# EAGLE board coin_acceptor____ (EAGLE 8.3.1)
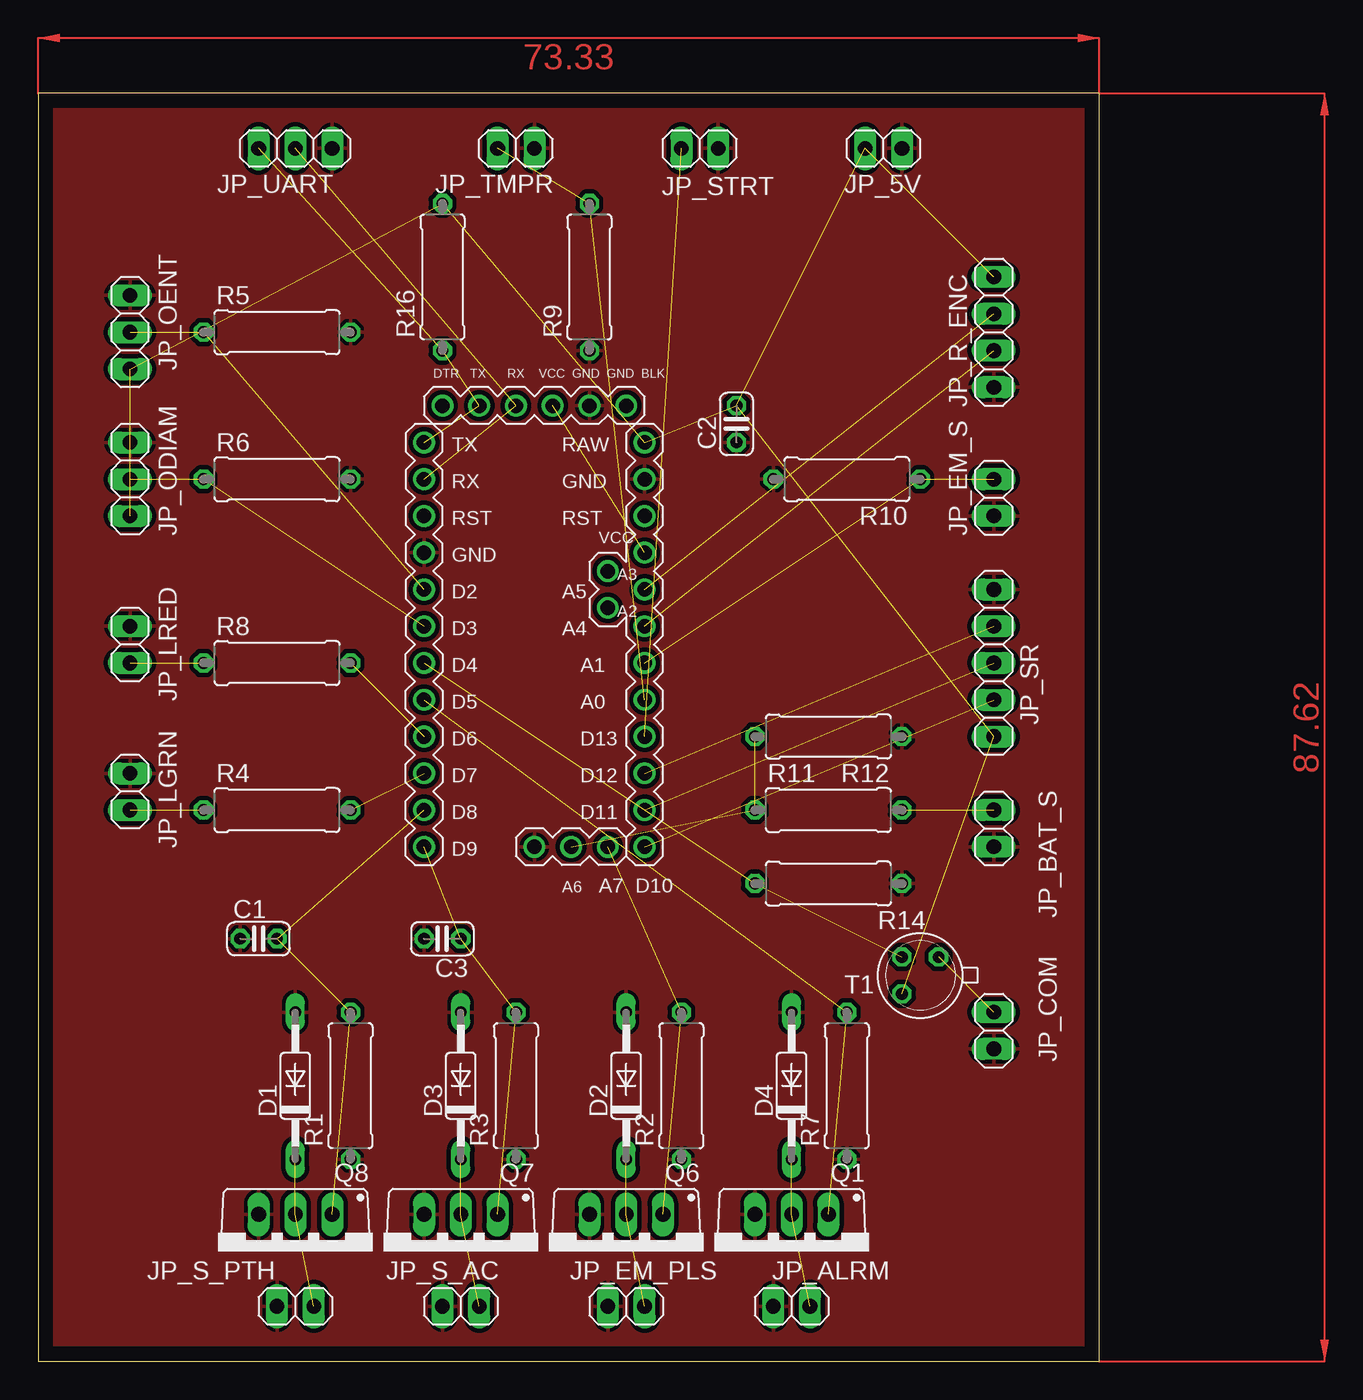
[diagram p0: board, top side]
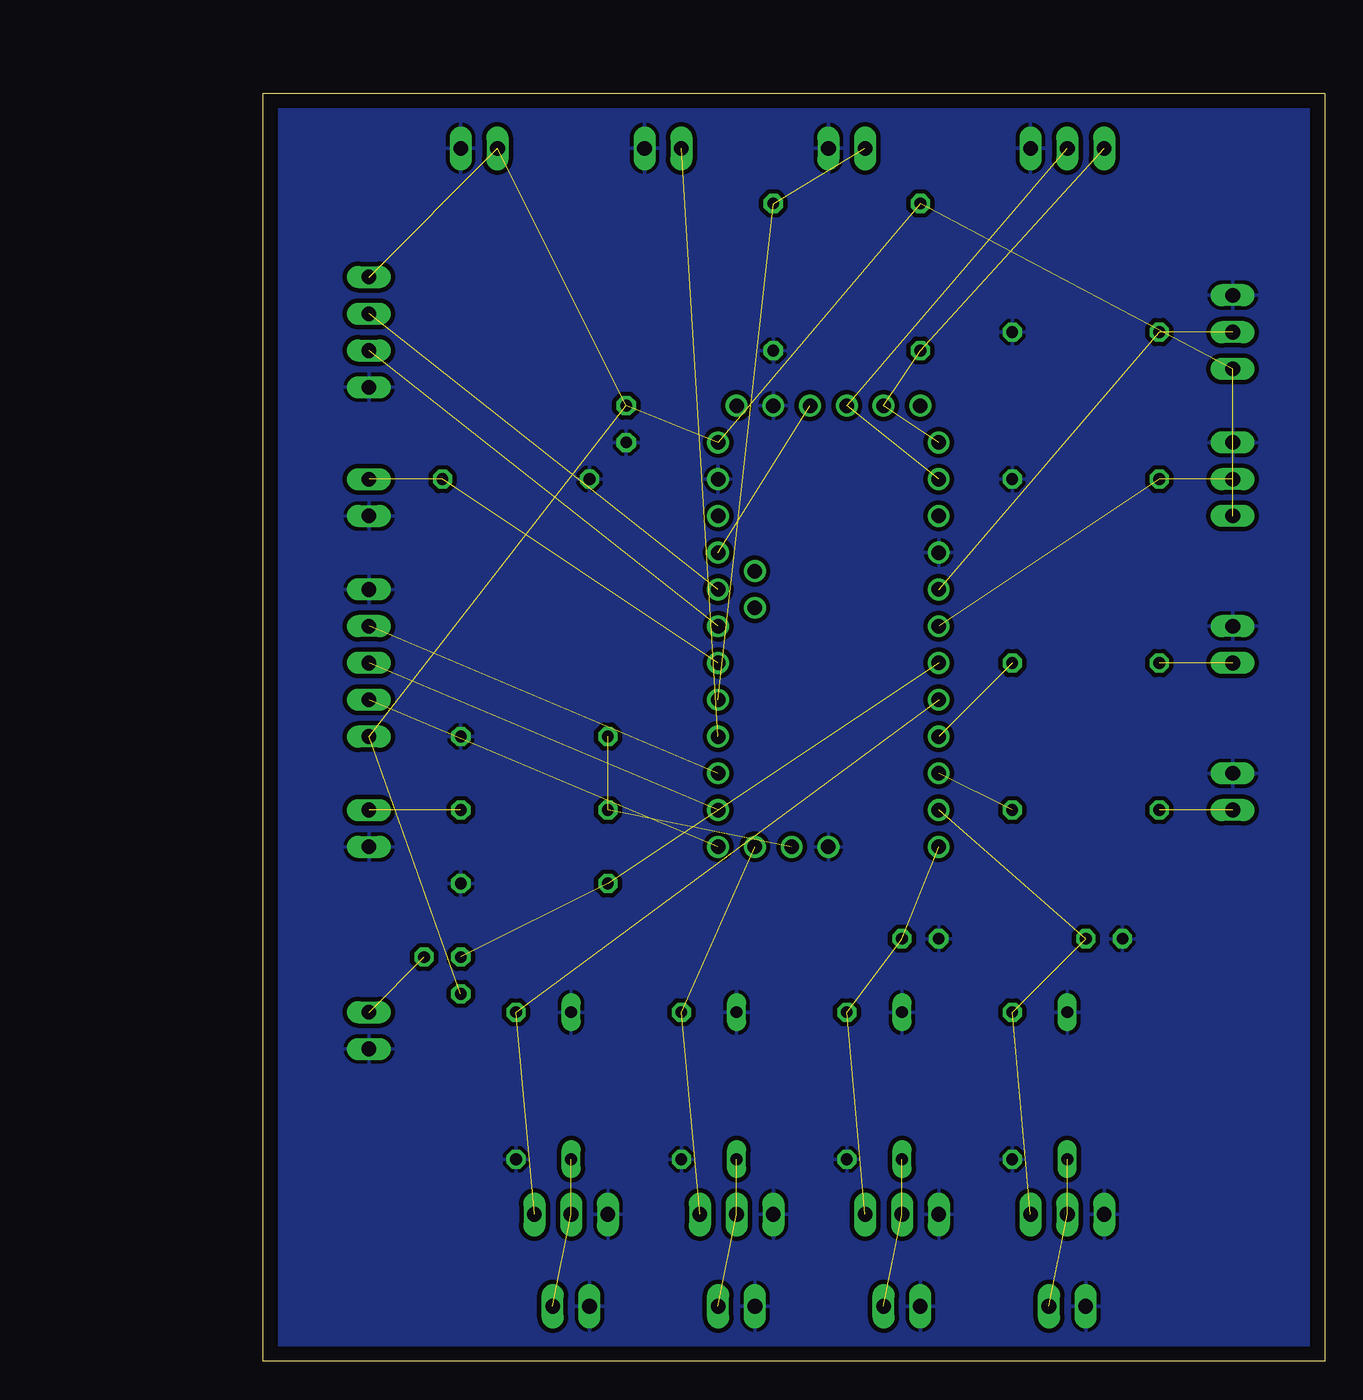
[diagram p1: board, bottom side, seen from below]

Size 73.33 x 87.62 mm. Coordinates in mm from the lower left corner, seen from the top.
Outline: 0,0 73.33,0 73.33,87.62 0,87.62 0,0
Copper layers (1*16): Top 0.035mm / dielectric 1.5mm / Bottom 0.035mm
Design rules "default *": minimum track width 20mil, minimum drill 0.35mm, track to track 6mil, track to pad 6mil, pad to pad 6mil, via to via 6mil, smd to smd 6mil, copper to edge 40mil, drill to drill 6mil, minimum pad ring 10mil, minimum via ring 8mil, stop-mask expansion 4mil, vias tented up to drill 0mil, thermal gap 10mil
Net classes: 0 default: width 0.508 mm, drill 0.254 mm, clearance 0.305 mm; 1 Supply: width 1.016 mm, drill 0.254 mm, clearance 0.305 mm; 2 Analog: width 0.762 mm, drill 0.254 mm, clearance 0.61 mm

## Footprints (pad centres in the part's own frame; a part is rotated, then mirrored left to right if it is on the bottom)
ARDUINO_PRO_MINI = drill 1: A0 11.43,-8.89; A1 11.43,-6.35; A2 11.43,-3.81; A3 11.43,-1.27; A4 8.89,-2.54; A5 8.89,0; A6 6.35,-19.05; A7 8.89,-19.05; BLK 10.16,11.43; D2 -3.81,-1.27; D3 -3.81,-3.81; D4 -3.81,-6.35; D5 -3.81,-8.89; D6 -3.81,-11.43; D7 -3.81,-13.97; D8 -3.81,-16.51; D9 -3.81,-19.05; D10 11.43,-19.05; D11 11.43,-16.51; D12 11.43,-13.97; D13 11.43,-11.43; DTR -2.54,11.43; GND -3.81,1.27; GND@1 11.43,6.35; GND@2 7.62,11.43; GND@3 3.81,-19.05; RAW 11.43,8.89; RST 11.43,3.81; RST@1 -3.81,3.81; RX -3.81,6.35; RX@1 2.54,11.43; TX -3.81,8.89; TX@1 0,11.43; VCC 11.43,1.27; VCC@1 5.08,11.43
C025-024X044 = drill 0.813 octagon: 1 -1.27,0; 2 1.27,0
DO35-10 = drill 0.813 long: A 5.08,0; C -5.08,0
1X02 = drill 1.016 long: 1 -1.27,0; 2 1.27,0
1X03 = drill 1.016 long: 1 -2.54,0; 2 0,0; 3 2.54,0
1X04 = drill 1.016 long: 1 -3.81,0; 2 -1.27,0; 3 1.27,0; 4 3.81,0
1X05 = drill 1.016 long: 1 -5.08,0; 2 -2.54,0; 3 0,0; 4 2.54,0; 5 5.08,0
TO220BV = drill 1.016 long: D 0,-2.54; G -2.54,-2.54; S 2.54,-2.54
0309/10 = drill 0.813 octagon: 1 -5.08,0; 2 5.08,0
TO18 = drill 0.813 octagon: 1 -1.27,-1.27; 2 1.27,-1.27; 3 1.27,1.27

## Placement (x,y rotation side)
ARDUINO1  [ARDUINO_PRO_MINI]  30.48,54.61 0 top
C1  10uF  [C025-024X044]  15.24,29.21 0 top
C2  10uF  [C025-024X044]  48.26,64.77 90 top
C3  10uF  [C025-024X044]  27.94,29.21 180 top
D1  [DO35-10]  17.78,19.05 90 top
D2  [DO35-10]  40.64,19.05 90 top
D3  [DO35-10]  29.21,19.05 90 top
D4  [DO35-10]  52.07,19.05 90 top
JP_5V  [1X02]  58.42,83.82 180 top
JP_ALRM  [1X02]  52.07,3.81 0 top
JP_BAT_S  [1X02]  66.04,36.83 90 top
JP_COM  [1X02]  66.04,22.86 90 top
JP_EM_PLS  [1X02]  40.64,3.81 0 top
JP_EM_S  [1X02]  66.04,59.69 90 top
JP_LGRN  [1X02]  6.35,39.37 270 top
JP_LRED  [1X02]  6.35,49.53 270 top
JP_ODIAM  [1X03]  6.35,60.96 270 top
JP_OENT  [1X03]  6.35,71.12 270 top
JP_R_ENC  [1X04]  66.04,71.12 90 top
JP_S_AC  [1X02]  29.21,3.81 0 top
JP_S_PTH  [1X02]  17.78,3.81 0 top
JP_SR  [1X05]  66.04,48.26 270 top
JP_STRT  [1X02]  45.72,83.82 180 top
JP_TMPR  [1X02]  33.02,83.82 180 top
JP_UART  [1X03]  17.78,83.82 180 top
Q1  IRF512  [TO220BV]  52.07,7.62 180 top
Q6  IRF512  [TO220BV]  40.64,7.62 180 top
Q7  IRF512  [TO220BV]  29.21,7.62 180 top
Q8  IRF512  [TO220BV]  17.78,7.62 180 top
R1  1k  [0309/10]  21.59,19.05 90 top
R2  1k  [0309/10]  44.45,19.05 90 top
R3  1k  [0309/10]  33.02,19.05 90 top
R4  0.3k  [0309/10]  16.51,38.1 0 top
R5  1k  [0309/10]  16.51,71.12 0 top
R6  1k  [0309/10]  16.51,60.96 0 top
R7  1k  [0309/10]  55.88,19.05 90 top
R8  0.3k  [0309/10]  16.51,48.26 0 top
R9  5k  [0309/10]  38.1,74.93 90 top
R10  100k  [0309/10]  55.88,60.96 180 top
R11  7k  [0309/10]  54.61,38.1 0 top
R12  2k  [0309/10]  54.61,43.18 180 top
R14  5k  [0309/10]  54.61,33.02 180 top
R16  1k  [0309/10]  27.94,74.93 90 top
T1  2N706  [TO18]  60.96,26.67 180 top

## Library data of the parts
ARDUINO1 = arduinopromini
C1-C3 = rcl
D1-D4 = diode
JP_5V JP_ALRM JP_BAT_S JP_COM JP_EM_PLS JP_EM_S JP_LGRN JP_LRED JP_ODIAM JP_OENT JP_R_ENC JP_S_AC JP_S_PTH JP_SR JP_STRT JP_TMPR JP_UART = pinhead
Q1 Q6-Q8 = transistor-power
R1-R12 R14 R16 = resistor
T1 = transistor

## Nets
+5V [Supply]: ARDUINO1.RAW C2.2 JP_5V.2 JP_ODIAM.3 JP_OENT.3 JP_R_ENC.4 JP_SR.5 R16.2 T1.3
ALARM_0: ARDUINO1.D5 Q1.G R7.2
ALARM_Q: D4.C JP_ALRM.2 Q1.D
BATT_SENS: ARDUINO1.A6 R11.1 R12.2
BTN_STRT: ARDUINO1.D13 JP_STRT.2
GND [Supply]: ARDUINO1.GND ARDUINO1.GND@1 ARDUINO1.GND@2 ARDUINO1.GND@3 C1.1 C2.1 C3.2 D1.A D2.A D3.A D4.A JP_5V.1 JP_ALRM.1 JP_BAT_S.1 JP_COM.1 JP_EM_PLS.1 JP_EM_S.1 JP_LGRN.1 JP_LRED.1 JP_ODIAM.1 JP_OENT.1 JP_R_ENC.1 JP_S_AC.1 JP_S_PTH.1 JP_SR.1 JP_STRT.1 JP_TMPR.1 JP_UART.1 Q1.S Q6.S Q7.S Q8.S R1.1 R2.1 R3.1 R5.2 R6.2 R7.1 R9.1 R10.2 R12.1 R14.1
GPRS_GPS: ARDUINO1.D4 R14.2 T1.2
LED_GRN: ARDUINO1.D7 R4.2
LED_RED: ARDUINO1.D6 R8.2
LED_STR1 [Analog]: ARDUINO1.A5
LED_STR_0: ARDUINO1.A4
N$1: JP_BAT_S.2 R11.2
OS_DIAM: ARDUINO1.D3 JP_ODIAM.2 R6.1
OS_ENT: ARDUINO1.D2 JP_OENT.2 R5.1
ROT_ENC_CLK: ARDUINO1.A2 JP_R_ENC.2
ROT_ENC_DT: ARDUINO1.A3 JP_R_ENC.3
RX0: ARDUINO1.RX ARDUINO1.RX@1 JP_UART.2
SOL_ACCPT: ARDUINO1.D9 C3.1 Q7.G R3.2
SOL_ACCPT_OUT2: JP_LGRN.2 R4.1
SOL_ACCPT_Q: D3.C JP_S_AC.2 Q7.D
SOL_EM_PULSER: ARDUINO1.A7 Q6.G R2.2
SOL_EM_PULSER_OUT2: JP_COM.2 T1.1
SOL_EM_PULSER_Q: D2.C JP_EM_PLS.2 Q6.D
SOL_EM_SENS [Analog]: ARDUINO1.A1 JP_EM_S.2 R10.1
SOL_PATH_BL: ARDUINO1.D8 C1.2 Q8.G R1.2
SOL_PATH_BL_OUT2: JP_LRED.2 R8.1
SOL_PATH_BL_Q: D1.C JP_S_PTH.2 Q8.D
SR_CK: ARDUINO1.D11 JP_SR.3
SR_D: ARDUINO1.D10 JP_SR.4
SR_L: ARDUINO1.D12 JP_SR.2
TMPR_SW: ARDUINO1.A0 JP_TMPR.2 R9.2
TX0: ARDUINO1.TX ARDUINO1.TX@1 JP_UART.3 R16.1
VCC: ARDUINO1.VCC ARDUINO1.VCC@1

## Tracks (layer width: path | path; a pad name or v marks a point on that pad's centre or on a via)
+5V  (8 unrouted)
ALARM_0  (2 unrouted)
ALARM_Q  (2 unrouted)
BATT_SENS  (2 unrouted)
BTN_STRT  (1 unrouted)
GND
  pour Top: -1.27,87.63 -1.27,0 2.54,-3.81 72.39,-3.81 77.47,1.27 77.47,82.55 71.12,88.9 0,88.9
  pour Bottom: -3.81,85.09 -3.81,0 0,-3.81 73.66,-3.81 82.55,5.08 82.55,82.55 73.66,91.44 2.54,91.44
GPRS_GPS  (2 unrouted)
LED_GRN  (1 unrouted)
LED_RED  (1 unrouted)
N$1  (1 unrouted)
OS_DIAM  (2 unrouted)
OS_ENT  (2 unrouted)
ROT_ENC_CLK  (1 unrouted)
ROT_ENC_DT  (1 unrouted)
RX0  (2 unrouted)
SOL_ACCPT  (3 unrouted)
SOL_ACCPT_OUT2  (1 unrouted)
SOL_ACCPT_Q  (2 unrouted)
SOL_EM_PULSER  (2 unrouted)
SOL_EM_PULSER_OUT2  (1 unrouted)
SOL_EM_PULSER_Q  (2 unrouted)
SOL_EM_SENS  (2 unrouted)
SOL_PATH_BL  (3 unrouted)
SOL_PATH_BL_OUT2  (1 unrouted)
SOL_PATH_BL_Q  (2 unrouted)
SR_CK  (1 unrouted)
SR_D  (1 unrouted)
SR_L  (1 unrouted)
TMPR_SW  (2 unrouted)
TX0  (3 unrouted)
VCC  (1 unrouted)
(copper drawn outside any net)
  shapes: Top area x2

## Text on the board
tDocu: RenAuto | BM rev 1